# Altium PCB SY8105ADC_PCB.PcbDoc
Units mil, origin at the board's own origin, x right, y up, seen from the top; angles counter-clockwise.
Board outline not stored, 4 copper layers (Top Layer, Internal Plane 1, Mid-Layer 1, Bottom Layer), stack 18.2 mil thick; 10 components, 0 nets, 24 pads, 0 vias.
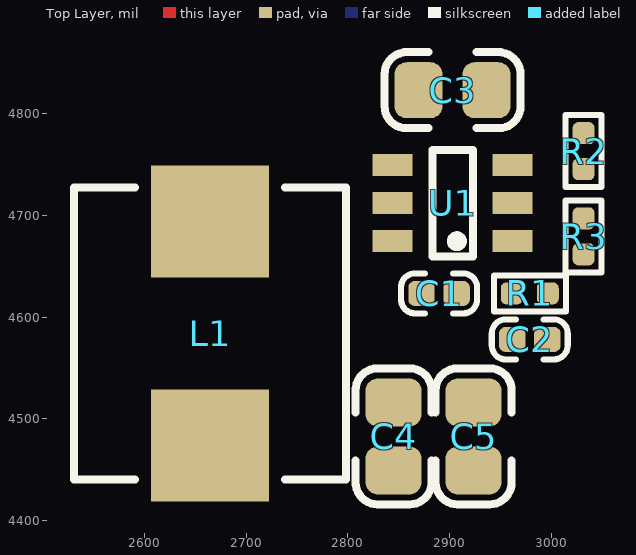
[diagram p0: Top Layer view]
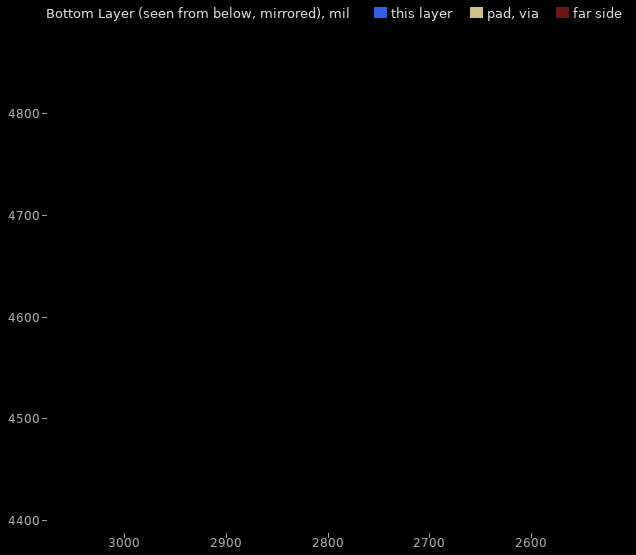
[diagram p1: Bottom Layer view, seen from below]
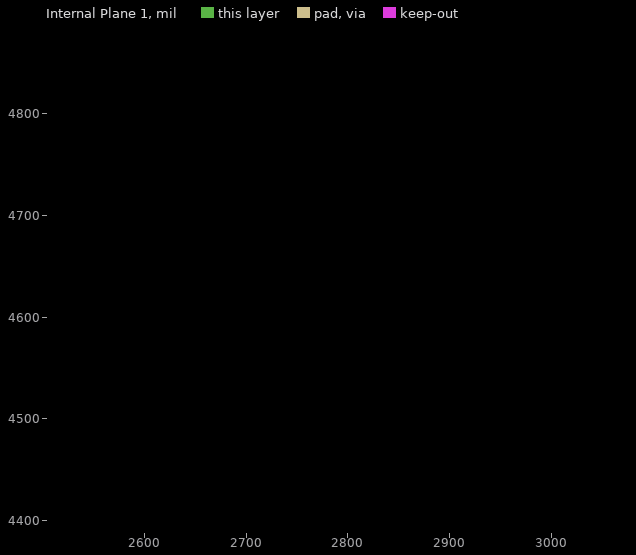
[diagram p2: Internal Plane 1, clearances drawn from the general rule]

## Layer stack, top to bottom
Top Solder: solder mask 0.4, Solder Resist, Dk 3.5
Top Layer: signal copper 1.4
Dielectric 1: dielectric 12.6, FR-4, Dk 4.8
Internal Plane 1: plane copper 1.4
Mid-Layer 1: signal copper 1.4
Bottom Layer: signal copper 1.4
Bottom Solder: solder mask 0.4, Solder Resist, Dk 3.5

## Components (designator, comment, footprint, x,y, rotation, side; value= is the part's Value field where it differs from the comment)
C1 "100nF" C_0402 2889.81,4623.35 r180 top
C2 "22pF" C_0402 2979.08,4578.08 r0 top
C3 "10uF" C_0805 2903.08,4823.35 r0 top
C4 "22uF" C_0805 2845.08,4482.67 r90 top
C5 "22uF" C_0805 2923.82,4482.67 r90 top
L1 "4.7uH/5.5A" Ind-SMD_7.3x6.6 2664.57,4583.86 r270 top
R1 "100kΩ" R_0402 2979.08,4623.35 r0 top
R2 "10kΩ" R_0402 3032.08,4763.35 r90 top
R3 "13.7kΩ" R_0402 3032.08,4679.59 r270 top
U1 "SY8105ADC" SOT23-6 2962.28,4674.73 r90 top

## Footprints (in the part's own frame and the unit in brackets; to place one, negate y for a bottom-side part, rotate by r counter-clockwise, add the part's x,y. Pads: shape width x height; smd on the part's side, far side on the other; paste and mask are expansions set on the pad)
C_0402 [mm] "Chip Capacitor, 2-Leads, Body 1.00x0.50mm, IPC Medium Density"
  rrect50% 0.66x0.62 smd: 1(-0.44,0) 2(0.44,0)
  silkscreen extent -0.95,-0.5 0.95,0.5, body extent -0.52,-0.27 0.53,0.28, height 0.55
C_0805 [mm] "Chip Capacitor, 2-Leads, Body 2.00x1.25mm, IPC Medium Density"
  rrect50% 1.2x1.4 smd: 1(-0.85,0) 2(0.85,0)
  silkscreen extent -1.7,-0.95 1.7,0.95, body extent -1,-0.62 1,0.63, height 0.88
Ind-SMD_7.3x6.6 [mm] "Molded Inductor, 2-Leads, Body 7.30x6.60mm, IPC Medium Density"
  rect 2.8x2.95 smd: 1(-2.8,0) 2(2.8,0)
  silkscreen extent -3.65,-3.4 3.65,3.4, body extent -3.45,-3.3 3.45,3.3, height 2.81
R_0402 [mm] "Chip Resistor, 2-Leads, Body 1.00x0.50mm, IPC Medium Density"
  rrect50% 0.55x0.55 smd: 1(-0.45,0) 2(0.45,0)
  silkscreen extent -0.9,-0.45 0.9,0.45, body extent -0.5,-0.27 0.5,0.28, height 0.4
SOT23-6 [mm]
  rect 0.55x1 smd: 1(0,0) 2(0.95,0) 3(1.9,0) 4(1.9,3) 5(0.95,3) 6(0,3)
  silkscreen extent -0.38,0.99 2.29,2.01, body extent -0.56,0.12 2.44,2.93, height 1.15

## Part data
C1 C2 C3 C4 C5: library part Cap_Chip, "贴片电容"
L1: library part Ind_Molded, "一体成型功率电感", LCSC=C207840, Manufacturer_Name=Sunltech(韩国顺磁), Manufacturer_Part_Number=SLO0630H4R7MTT
R1 R2 R3: library part Res_Chip, "贴片电阻"
U1: "DC-DC芯片", Manufacturer_Name=Silergy, Manufacturer_Part_Number_1=SY8104ADC, ComponentLink1Description=LCSC, ComponentLink1URL=https://item.szlcsc.com/208856.html, Manufacturer_Name_1=Silergy, Manufacturer_Part_Number=SY8105ADC

## Nets (pads, with @x,y where several pads share a name; then routed paths per layer and width w, separated by ;. In a path a pad name is that pad's centre, name@x,y a point inside that pad or via, vN(x,y) a via of type N, cw(c..) or ccw(c..) an arc to the next point about the centre after c; other vN are vias at no path point)
pads on no net: C1.1 C1.2 C2.1 C2.2 C3.1 C3.2 C4.1 C4.2 C5.1 C5.2 L1.1 L1.2 R1.1 R1.2 R2.1 R2.2 R3.1 R3.2 U1.1 U1.2 U1.3 U1.4 U1.5 U1.6